# EAGLE board heaterCtl (EAGLE 4.16)
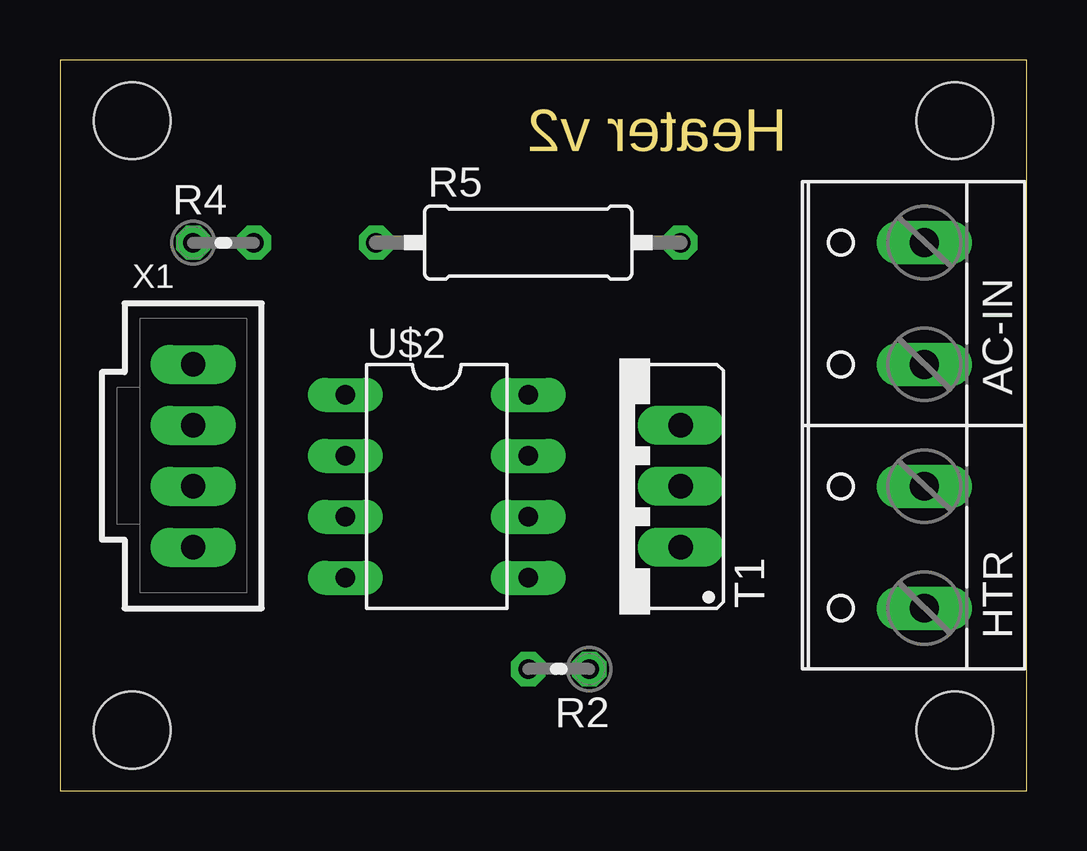
[diagram p0: board, top side]
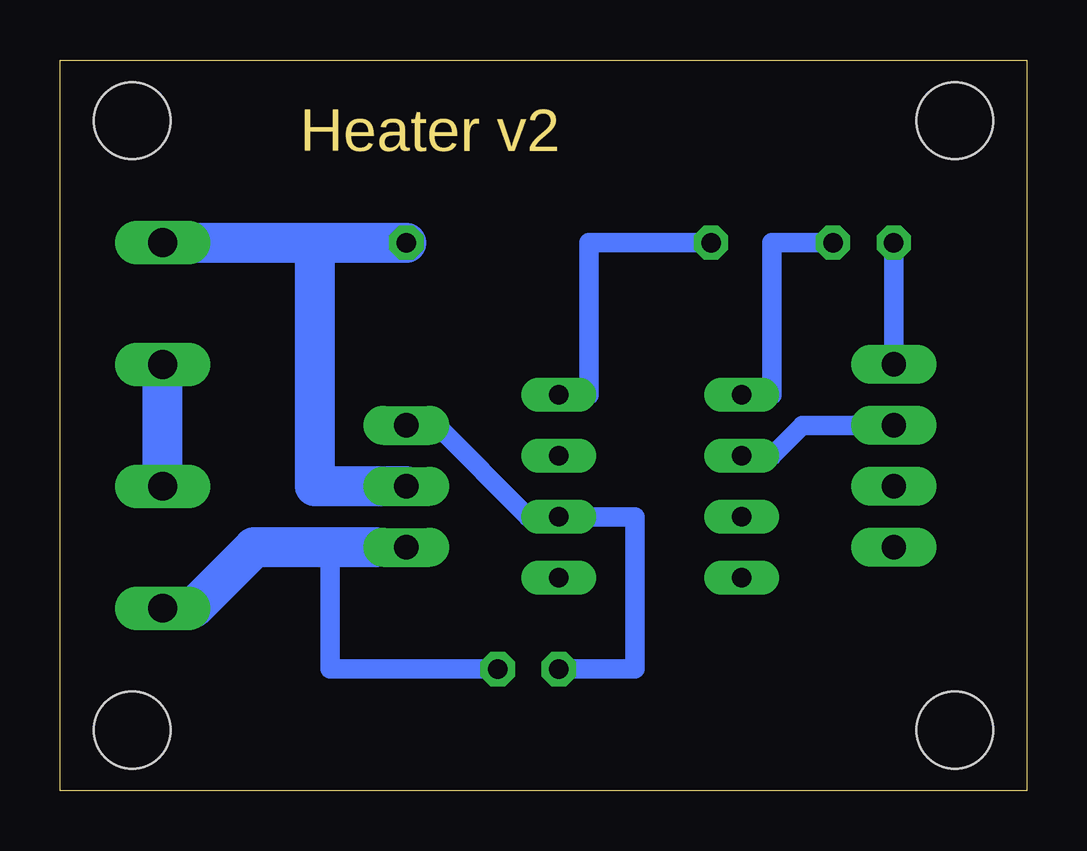
[diagram p1: board, bottom side, seen from below]

Size 40.31 x 30.47 mm. Coordinates in mm from the lower left corner, seen from the top.
Outline: 0,0 40.31,0 40.31,30.47 0,30.47 0,0
Copper layers (1*16): Top 0.035mm / dielectric 1.5mm / Bottom 0.035mm
Design rules "dave": minimum track width 16mil, minimum drill 24mil, track to track 12mil, track to pad 12mil, pad to pad 12mil, via to via 12mil, smd to smd 8mil, copper to edge 40mil, drill to drill 12mil, minimum pad ring 12mil, minimum via ring 12mil, stop-mask expansion 4mil, vias tented up to drill 0mil, thermal gap 10mil
Holes 3.2 mm at 37.3,2.54 3.01,2.54 3.01,27.94 37.3,27.94

## Footprints (pad centres in the part's own frame; a part is rotated, then mirrored left to right if it is on the bottom)
W237-132 = drill 1.194 long: 1 -2.54,-0.635; 2 2.54,-0.635
0204V = drill 0.813 octagon: 1 -1.27,0; 2 1.27,0
0309/12 = drill 0.813 octagon: 1 -6.35,0; 2 6.35,0
TO220CS = drill 1.016 long: A 0,-2.54; C -2.54,-2.54; G 2.54,-2.54
DIL08 = drill 0.813 long: 1 -3.81,-3.81; 2 -1.27,-3.81; 3 1.27,-3.81; 4 3.81,-3.81; 5 3.81,3.81; 6 1.27,3.81; 7 -1.27,3.81; 8 -3.81,3.81
70543-04 = drill 1.016 long: 1 -3.81,0; 2 -1.27,0; 3 1.27,0; 4 3.81,0

## Placement (x,y rotation side)
AC-IN  [W237-132]  35.39,20.32 90 top
HTR  [W237-132]  35.39,10.15 90 top
R2  1K  [0204V]  20.79,5.08 180 top
R4  180  [0204V]  6.82,22.86 0 top
R5  180  [0309/12]  19.52,22.86 0 top
T1  TIC116  [TO220CS]  23.33,12.69 90 top
U$2  MOC3031  [DIL08]  15.71,12.69 270 top
X1  C-GRID-04-70543  [70543-04]  5.55,13.96 270 top

## Library data of the parts
AC-IN HTR = con-wago-508
R2 R4 R5 = rcl
T1 = triac
U$2 = maxim-9
X1 = con-molex

## Nets
N$1: AC-IN.1 HTR.2
N$2: R4.2 U$2.1
N$3: R5.1 U$2.8
N$5: U$2.2 X1.2
N$9: AC-IN.2 R5.2 T1.A
N$48: R2.2 T1.G U$2.6
N$49: HTR.1 R2.1 T1.C
N/C: U$2.3
VCC: R4.1 X1.1

## Tracks (layer width: path | path; a pad name or v marks a point on that pad's centre or on a via)
N$1
  Bottom 1.676: HTR.2 AC-IN.1
N$2
  Bottom 0.813: R4.2 10.63,22.86 10.63,16.51 U$2.1
N$3
  Bottom 0.813: R5.1 18.25,22.86 18.25,16.51 U$2.8
N$5
  Bottom 0.813: U$2.2 10.63,13.96 9.36,15.23 X1.2
N$9
  Bottom 1.676: AC-IN.2 29.68,22.86 | 29.68,22.86 R5.2 | 29.68,22.86 29.68,12.69 T1.A
N$48
  Bottom 0.305: 20.79,11.42 U$2.6
  Bottom 0.813: R2.2 16.34,5.08 16.34,11.42 20.79,11.42 24.6,15.23 T1.G
N$49
  Bottom 0.305: 29.04,10.15 27.14,10.15 T1.C
  Bottom 0.813: R2.1 29.04,5.08 29.04,10.15
  Bottom 1.676: 27.14,10.15 32.22,10.15 34.76,7.62 HTR.1
VCC
  Bottom 0.813: X1.1 R4.1

## Text on the board
Dimension: Heater v2